# Altium PCB Inverter.PcbDoc (part 2 of 4)
Units mm, origin at the board's own origin, x right, y up, seen from the top; angles counter-clockwise.
Board outline 150 x 100 mm, 2 copper layers (Top Layer, Bottom Layer), stack 1.74 mm thick; 301 components, 199 nets, 1760 pads, 839 vias.
Unrouted connection lines stored in the file: 1.
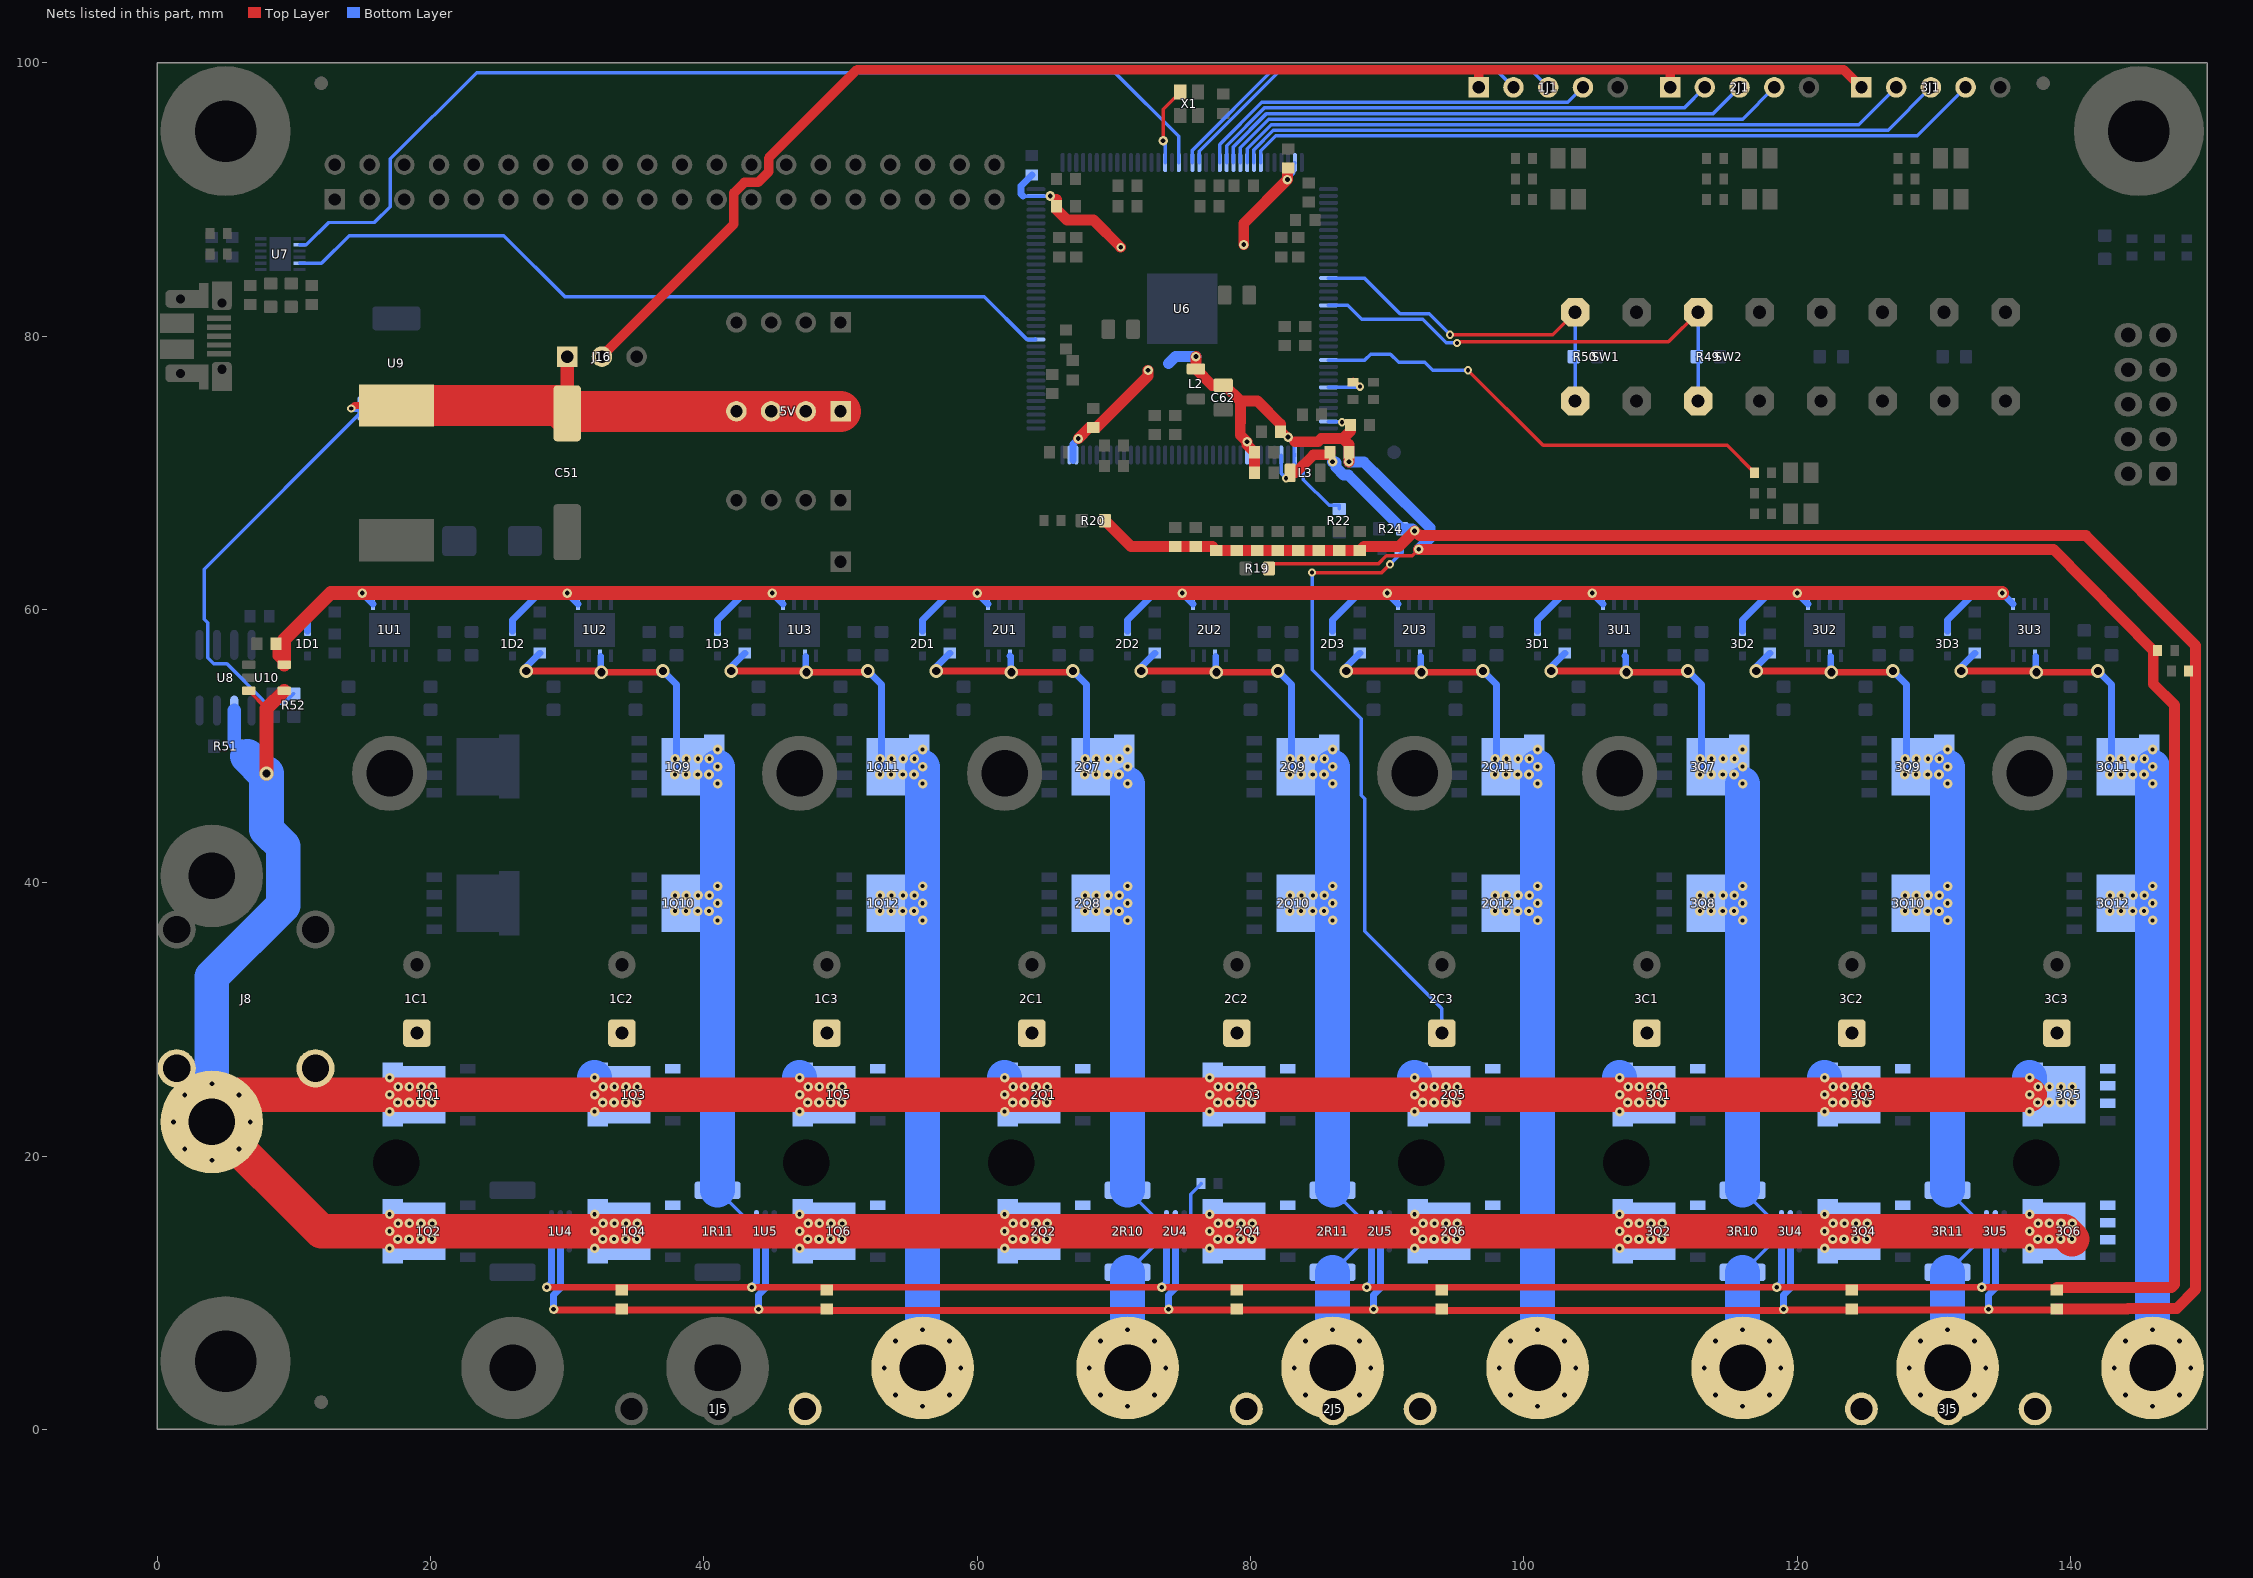
[diagram p2: the nets of this part, all layers, seen from the top]

## Via types
v1: diameter 0.7, hole 0.3, Top Layer to Bottom Layer, 475 vias
v2: diameter 0.7, hole 0.35, Top Layer to Bottom Layer, 232 vias
v3: diameter 0.6, hole 0.3, Top Layer to Bottom Layer, 78 vias
v4: diameter 1, hole 0.6, Top Layer to Bottom Layer, 30 vias
v5: diameter 1.27, hole 0.5, Top Layer to Bottom Layer, 24 vias

## Nets (pads, with @x,y where several pads share a name; then routed paths per layer and width w, separated by ;. In a path a pad name is that pad's centre, name@x,y a point inside that pad or via, vN(x,y) a via of type N, cw(c..) or ccw(c..) an arc to the next point about the centre after c; other vN are vias at no path point) (continued)
1PH_B_Q: 1C5.1 1Q3.S 1Q4.S 1Q9.D 1Q10.D 1R11.2 1U2.6 1U5.4 | length 269.2
  Top Layer w0.5: v4(27,55.5) v4@32.4,55.5 ; v4(32.5,55.4) v4@36.9,55.4
  Bottom Layer w0.254: 1R11.2@41,17.5 42.875,15.625 1U5.4@43.85,15.625
  Bottom Layer w0.5: v4(27,55.5) 27,55.8 1C5.1@28,56.8 ; v4@32.45,55.45 1U2.6@32.45,56.555 ; v4(37,55.5) 38,54.5 ; 1Q9.D@38,48.5 1Q9.D@38,49.075 ; 1Q9.D@38,48.5 38,54.5 ; 1Q9.D@38,48.5 38,54.5 ; 1Q9.D@38,48.5 38,54.5 ; 1Q9.D@38,48.5 38,54.5 ; 1Q9.D@38,48.5 38,54.5 ; 1Q9.D@38,48.5 38,54.5 ; 1Q9.D@38,48.5 1Q9.D@38,49.075 ; 1Q9.D@38,48.5 1Q9.D@38,49.075 ; 1Q9.D@38,48.5 1Q9.D@38,49.075 ; 1Q9.D@38,48.5 1Q9.D@38,49.075 ; 1Q9.D@38,48.5 38,54.5 ; 1Q9.D@38,48.5 38,54.5 ; 1Q9.D@38,48.5 1Q9.D@38,49.075 ; 1Q9.D@38,48.5 38,54.5 ; 1Q9.D@38,48.5 1Q9.D@38,49.075 ; 1Q9.D@38,48.5 1Q9.D@38,49.075 ; 1Q9.D@38,48.5 38,54.5 ; 1Q9.D@38,48.5 38,54.5 ; 1Q9.D@38,48.5 38,54.5 ; 1Q9.D@38,48.5 38,54.5 ; 1Q9.D@38,48.5 38,54.5 ; 1Q9.D@38,48.5 1Q9.D@38,49.075 ; 1Q9.D@38,49.075 38,54.5 ; 1Q9.D@38,49.075 38,54.5 ; 1Q9.D@38,49.075 38,54.5 ; 1Q9.D@38,49.075 38,54.5 ; 1Q9.D@38,49.075 38,54.5 ; 1Q9.D@38,49.075 38,54.5 ; 1Q9.D@38,49.075 38,54.5 ; 1Q9.D@38,49.075 38,54.5 ; 1Q9.D@38,49.075 38,54.5
  Bottom Layer w2.54: 1R11.2@41,17.5 v1(41,38.5) ; v1(41,37.25) 1Q10.D@41,37.925 ; v1(41,37.25) v1(41,38.5) ; v1(41,37.25) v1(41,38.5) ; v1(41,37.25) v1(41,38.5) ; v1(41,37.25) v1(41,38.5) ; v1(41,37.25) v1(41,38.5) ; v1(41,37.25) v1(41,38.5) ; v1(41,37.25) v1(41,38.5) ; v1(41,37.25) v1(41,38.5) ; v1(41,37.25) v1(41,38.5) ; v1(41,37.25) v1(41,38.5) ; v1(41,37.25) v1(41,38.5) ; v1(41,37.25) 1Q10.D@41,37.925 ; v1(41,37.25) 1Q10.D@41,37.925 ; v1(41,37.25) 1Q10.D@41,37.925 ; v1(41,37.25) 1Q10.D@41,37.925 ; v1(41,37.25) v1(41,38.5) ; v1(41,37.25) 1Q10.D@41,37.925 ; v1(41,37.25) v1(41,38.5) ; v1(41,37.25) 1Q10.D@41,37.925 ; v1(41,37.25) 1Q10.D@41,37.925 ; v1(41,37.25) 1Q10.D@41,37.925 ; 1Q10.D@41,37.925 v1(41,38.5) ; 1Q10.D@41,37.925 v1(41,38.5) ; 1Q10.D@41,37.925 v1(41,38.5) ; 1Q10.D@41,37.925 v1(41,38.5) ; 1Q10.D@41,37.925 v1(41,38.5) ; 1Q10.D@41,37.925 v1(41,38.5) ; 1Q10.D@41,37.925 v1(41,38.5) ; 1Q10.D@41,37.925 v1(41,38.5) ; 1Q10.D@41,37.925 v1(41,38.5) ; v1(41,38.5) 1Q10.D@41,39.075 ; v1(41,38.5) v1(41,39.75) ; v1(41,38.5) v1(41,39.75) ; v1(41,38.5) v1(41,39.75) ; v1(41,38.5) 1Q10.D@41,39.075 ; v1(41,38.5) v1(41,39.75) ; v1(41,38.5) v1(41,39.75) ; v1(41,38.5) v1(41,39.75) ; v1(41,38.5) 1Q10.D@41,39.075 ; v1(41,38.5) v1(41,39.75) ; v1(41,38.5) v1(41,39.75) ; v1(41,38.5) 1Q10.D@41,39.075 ; v1(41,38.5) 1Q10.D@41,39.075 ; v1(41,38.5) 1Q10.D@41,39.075 ; v1(41,38.5) 1Q10.D@41,39.075 ; v1(41,38.5) v1(41,39.75) ; v1(41,38.5) v1(41,39.75) ; v1(41,38.5) v1(41,39.75) ; v1(41,38.5) 1Q10.D@41,39.075 ; v1(41,38.5) v1(41,39.75) ; v1(41,38.5) v1(41,39.75) ; v1(41,38.5) 1Q10.D@41,39.075 ; v1(41,38.5) v1(41,39.75) ; 1Q10.D@41,39.075 v1(41,39.75) ; 1Q10.D@41,39.075 v1(41,39.75) ; 1Q10.D@41,39.075 v1(41,39.75) ; 1Q10.D@41,39.075 v1(41,39.75) ; 1Q10.D@41,39.075 v1(41,39.75) ; 1Q10.D@41,39.075 v1(41,39.75) ; 1Q10.D@41,39.075 v1(41,39.75) ; 1Q10.D@41,39.075 v1(41,39.75) ; 1Q10.D@41,39.075 v1(41,39.75) ; v1(41,39.75) v1(41,47.25) ; v1(41,47.25) 1Q9.D@41,47.925 ; v1(41,47.25) v1(41,48.5) ; v1(41,47.25) v1(41,48.5) ; v1(41,47.25) v1(41,48.5) ; v1(41,47.25) v1(41,48.5) ; v1(41,47.25) v1(41,48.5) ; v1(41,47.25) v1(41,48.5) ; v1(41,47.25) v1(41,48.5) ; v1(41,47.25) v1(41,48.5) ; v1(41,47.25) v1(41,48.5) ; v1(41,47.25) 1Q9.D@41,47.925 ; v1(41,47.25) 1Q9.D@41,47.925 ; v1(41,47.25) 1Q9.D@41,47.925 ; v1(41,47.25) v1(41,48.5) ; v1(41,47.25) v1(41,48.5) ; v1(41,47.25) 1Q9.D@41,47.925 ; v1(41,47.25) 1Q9.D@41,47.925 ; v1(41,47.25) 1Q9.D@41,47.925 ; v1(41,47.25) 1Q9.D@41,47.925 ; v1(41,47.25) v1(41,48.5) ; v1(41,47.25) v1(41,48.5) ; v1(41,47.25) v1(41,48.5) ; v1(41,47.25) 1Q9.D@41,47.925 ; 1Q9.D@41,47.925 v1(41,48.5) ; 1Q9.D@41,47.925 v1(41,48.5) ; 1Q9.D@41,47.925 v1(41,48.5) ; 1Q9.D@41,47.925 v1(41,48.5) ; 1Q9.D@41,47.925 v1(41,48.5) ; 1Q9.D@41,47.925 v1(41,48.5) ; 1Q9.D@41,47.925 v1(41,48.5) ; 1Q9.D@41,47.925 v1(41,48.5) ; 1Q9.D@41,47.925 v1(41,48.5)
  other v1: 37.875,37.925 38.7,37.925 39.55,37.925 40.375,37.925 37.9,39.075 38.725,39.075 39.575,39.075 40.4,39.075 37.875,47.925 38.7,47.925 39.55,47.925 40.375,47.925 37.9,49.075 38.725,49.075 39.575,49.075 40.4,49.075 41,49.75
1PH_C: 1C6.1 1C.1 1J5.3 1Q5.S 1Q6.S 1Q11.D 1Q12.D 1U3.6 | length 278.5
  Top Layer w0.5: v4(42,55.5) v4@47.4,55.5 ; v4(47.5,55.4) v4@51.9,55.4
  Bottom Layer w0.5: v4(42,55.5) 42,55.8 1C6.1@43,56.8 ; v4@47.45,55.45 1U3.6@47.45,56.555 ; v4(52,55.5) 53,54.5 ; 1Q11.D@53,48.5 1Q11.D@53,49.075 ; 1Q11.D@53,48.5 53,54.5 ; 1Q11.D@53,48.5 53,54.5 ; 1Q11.D@53,48.5 53,54.5 ; 1Q11.D@53,48.5 1Q11.D@53,49.075 ; 1Q11.D@53,48.5 1Q11.D@53,49.075 ; 1Q11.D@53,48.5 1Q11.D@53,49.075 ; 1Q11.D@53,48.5 1Q11.D@53,49.075 ; 1Q11.D@53,48.5 1Q11.D@53,49.075 ; 1Q11.D@53,48.5 1Q11.D@53,49.075 ; 1Q11.D@53,48.5 1Q11.D@53,49.075 ; 1Q11.D@53,48.5 53,54.5 ; 1Q11.D@53,48.5 53,54.5 ; 1Q11.D@53,48.5 53,54.5 ; 1Q11.D@53,48.5 53,54.5 ; 1Q11.D@53,48.5 53,54.5 ; 1Q11.D@53,48.5 1Q11.D@53,49.075 ; 1Q11.D@53,48.5 53,54.5 ; 1Q11.D@53,48.5 53,54.5 ; 1Q11.D@53,48.5 53,54.5 ; 1Q11.D@53,48.5 53,54.5 ; 1Q11.D@53,48.5 53,54.5 ; 1Q11.D@53,48.5 53,54.5 ; 1Q11.D@53,49.075 53,54.5 ; 1Q11.D@53,49.075 53,54.5 ; 1Q11.D@53,49.075 53,54.5 ; 1Q11.D@53,49.075 53,54.5 ; 1Q11.D@53,49.075 53,54.5 ; 1Q11.D@53,49.075 53,54.5 ; 1Q11.D@53,49.075 53,54.5 ; 1Q11.D@53,49.075 53,54.5 ; 1Q11.D@53,49.075 53,54.5
  Bottom Layer w2.54: 1C.1@56,4.5 v1(56,37.25) ; v1(56,37.25) 1Q12.D@56,37.925 ; v1(56,37.25) v1(56,38.5) ; v1(56,37.25) 1Q12.D@56,37.925 ; v1(56,37.25) v1(56,38.5) ; v1(56,37.25) v1(56,38.5) ; v1(56,37.25) v1(56,38.5) ; v1(56,37.25) v1(56,38.5) ; v1(56,37.25) v1(56,38.5) ; v1(56,37.25) v1(56,38.5) ; v1(56,37.25) v1(56,38.5) ; v1(56,37.25) v1(56,38.5) ; v1(56,37.25) v1(56,38.5) ; v1(56,37.25) v1(56,38.5) ; v1(56,37.25) v1(56,38.5) ; v1(56,37.25) v1(56,38.5) ; v1(56,37.25) 1Q12.D@56,37.925 ; v1(56,37.25) 1Q12.D@56,37.925 ; v1(56,37.25) 1Q12.D@56,37.925 ; v1(56,37.25) 1Q12.D@56,37.925 ; v1(56,37.25) v1(56,38.5) ; v1(56,37.25) 1Q12.D@56,37.925 ; v1(56,37.25) 1Q12.D@56,37.925 ; v1(56,37.25) 1Q12.D@56,37.925 ; 1Q12.D@56,37.925 v1(56,38.5) ; 1Q12.D@56,37.925 v1(56,38.5) ; 1Q12.D@56,37.925 v1(56,38.5) ; 1Q12.D@56,37.925 v1(56,38.5) ; 1Q12.D@56,37.925 v1(56,38.5) ; 1Q12.D@56,37.925 v1(56,38.5) ; 1Q12.D@56,37.925 v1(56,38.5) ; 1Q12.D@56,37.925 v1(56,38.5) ; 1Q12.D@56,37.925 v1(56,38.5) ; v1(56,38.5) 1Q12.D@56,39.075 ; v1(56,38.5) v1(56,39.75) ; v1(56,38.5) v1(56,39.75) ; v1(56,38.5) 1Q12.D@56,39.075 ; v1(56,38.5) v1(56,39.75) ; v1(56,38.5) v1(56,39.75) ; v1(56,38.5) v1(56,39.75) ; v1(56,38.5) v1(56,39.75) ; v1(56,38.5) 1Q12.D@56,39.075 ; v1(56,38.5) v1(56,39.75) ; v1(56,38.5) 1Q12.D@56,39.075 ; v1(56,38.5) 1Q12.D@56,39.075 ; v1(56,38.5) 1Q12.D@56,39.075 ; v1(56,38.5) v1(56,39.75) ; v1(56,38.5) v1(56,39.75) ; v1(56,38.5) v1(56,39.75) ; v1(56,38.5) 1Q12.D@56,39.075 ; v1(56,38.5) v1(56,39.75) ; v1(56,38.5) v1(56,39.75) ; v1(56,38.5) v1(56,39.75) ; v1(56,38.5) v1(56,39.75) ; v1(56,38.5) 1Q12.D@56,39.075 ; v1(56,38.5) 1Q12.D@56,39.075 ; 1Q12.D@56,39.075 v1(56,39.75) ; 1Q12.D@56,39.075 v1(56,39.75) ; 1Q12.D@56,39.075 v1(56,39.75) ; 1Q12.D@56,39.075 v1(56,39.75) ; 1Q12.D@56,39.075 v1(56,39.75) ; 1Q12.D@56,39.075 v1(56,39.75) ; 1Q12.D@56,39.075 v1(56,39.75) ; 1Q12.D@56,39.075 v1(56,39.75) ; 1Q12.D@56,39.075 v1(56,39.75) ; v1(56,39.75) v1(56,47.25) ; v1(56,47.25) 1Q11.D@56,47.925 ; v1(56,47.25) v1(56,48.5) ; v1(56,47.25) v1(56,48.5) ; v1(56,47.25) v1(56,48.5) ; v1(56,47.25) v1(56,48.5) ; v1(56,47.25) v1(56,48.5) ; v1(56,47.25) v1(56,48.5) ; v1(56,47.25) v1(56,48.5) ; v1(56,47.25) v1(56,48.5) ; v1(56,47.25) v1(56,48.5) ; v1(56,47.25) v1(56,48.5) ; v1(56,47.25) 1Q11.D@56,47.925 ; v1(56,47.25) 1Q11.D@56,47.925 ; v1(56,47.25) v1(56,48.5) ; v1(56,47.25) 1Q11.D@56,47.925 ; v1(56,47.25) v1(56,48.5) ; v1(56,47.25) v1(56,48.5) ; v1(56,47.25) 1Q11.D@56,47.925 ; v1(56,47.25) 1Q11.D@56,47.925 ; v1(56,47.25) 1Q11.D@56,47.925 ; v1(56,47.25) 1Q11.D@56,47.925 ; v1(56,47.25) 1Q11.D@56,47.925 ; v1(56,47.25) v1(56,48.5) ; 1Q11.D@56,47.925 v1(56,48.5) ; 1Q11.D@56,47.925 v1(56,48.5) ; 1Q11.D@56,47.925 v1(56,48.5) ; 1Q11.D@56,47.925 v1(56,48.5) ; 1Q11.D@56,47.925 v1(56,48.5) ; 1Q11.D@56,47.925 v1(56,48.5) ; 1Q11.D@56,47.925 v1(56,48.5) ; 1Q11.D@56,47.925 v1(56,48.5) ; 1Q11.D@56,47.925 v1(56,48.5)
  other v1: 52.875,37.925 53.7,37.925 54.55,37.925 55.375,37.925 52.9,39.075 53.725,39.075 54.575,39.075 55.4,39.075 52.875,47.925 53.7,47.925 54.55,47.925 55.375,47.925 52.9,49.075 53.725,49.075 54.575,49.075 55.4,49.075 56,49.75
  other v2: 56,1.7 54.02,2.52 57.98,2.52 53.2,4.5 58.8,4.5 54.02,6.48 57.98,6.48 56,7.3
2PH_A: 2A.1 2J5.1 2R10.1 2U4.5 | length 12.6
  Bottom Layer w0.254: 2R10.1@71,11.5 74.5,15 2U4.5@74.5,15.625
  Bottom Layer w2.54: 2A.1@71,4.5 v2(71,7.3) 2R10.1@71,11.5
  other v2: 71,1.7 69.02,2.52 72.98,2.52 68.2,4.5 73.8,4.5 69.02,6.48 72.98,6.48
2PH_A_Q: 2C4.1 2Q1.S 2Q2.S 2Q7.D 2Q8.D 2R10.2 2U1.6 2U4.4 | length 241
  Top Layer w0.5: v4(57,55.5) v4@62.4,55.5 ; v4(62.5,55.4) 66.9,55.4 v4(67,55.5)
  Bottom Layer w0.254: 2R10.2@71,17.5 72.875,15.625 2U4.4@73.85,15.625
  Bottom Layer w0.5: 2C4.1@58,56.8 v4@57,55.8 ; 2U1.6@62.4,56.605 62.45,56.555 62.45,55.45 v4(62.5,55.4) ; v4(67,55.5) 68,54.5 ; v4@57,55.8 v4(57,55.5) v4@57,55.8 ; 2Q7.D@68,48.5 2Q7.D@68,49.075 ; 2Q7.D@68,48.5 68,54.5 ; 2Q7.D@68,48.5 68,54.5 ; 2Q7.D@68,48.5 68,54.5 ; 2Q7.D@68,48.5 68,54.5 ; 2Q7.D@68,48.5 68,54.5 ; 2Q7.D@68,48.5 2Q7.D@68,49.075 ; 2Q7.D@68,48.5 68,54.5 ; 2Q7.D@68,48.5 68,54.5 ; 2Q7.D@68,48.5 68,54.5 ; 2Q7.D@68,48.5 68,54.5 ; 2Q7.D@68,48.5 2Q7.D@68,49.075 ; 2Q7.D@68,48.5 2Q7.D@68,49.075 ; 2Q7.D@68,48.5 68,54.5 ; 2Q7.D@68,48.5 2Q7.D@68,49.075 ; 2Q7.D@68,48.5 2Q7.D@68,49.075 ; 2Q7.D@68,48.5 68,54.5 ; 2Q7.D@68,48.5 68,54.5 ; 2Q7.D@68,48.5 68,54.5 ; 2Q7.D@68,48.5 68,54.5 ; 2Q7.D@68,48.5 2Q7.D@68,49.075 ; 2Q7.D@68,48.5 2Q7.D@68,49.075 ; 2Q7.D@68,48.5 2Q7.D@68,49.075 ; 2Q7.D@68,49.075 68,54.5 ; 2Q7.D@68,49.075 68,54.5 ; 2Q7.D@68,49.075 68,54.5 ; 2Q7.D@68,49.075 68,54.5 ; 2Q7.D@68,49.075 68,54.5 ; 2Q7.D@68,49.075 68,54.5 ; 2Q7.D@68,49.075 68,54.5 ; 2Q7.D@68,49.075 68,54.5 ; 2Q7.D@68,49.075 68,54.5
  Bottom Layer w2.54: 2R10.2@71,17.5 v1(71,37.25) ; v1(71,47.25) v1(71,39.75) ; v1(71,37.25) 2Q8.D@71,37.925 ; v1(71,37.25) v1(71,38.5) ; v1(71,37.25) v1(71,38.5) ; v1(71,37.25) v1(71,38.5) ; v1(71,37.25) 2Q8.D@71,37.925 ; v1(71,37.25) 2Q8.D@71,37.925 ; v1(71,37.25) 2Q8.D@71,37.925 ; v1(71,37.25) 2Q8.D@71,37.925 ; v1(71,37.25) v1(71,38.5) ; v1(71,37.25) v1(71,38.5) ; v1(71,37.25) v1(71,38.5) ; v1(71,37.25) v1(71,38.5) ; v1(71,37.25) v1(71,38.5) ; v1(71,37.25) v1(71,38.5) ; v1(71,37.25) v1(71,38.5) ; v1(71,37.25) v1(71,38.5) ; v1(71,37.25) 2Q8.D@71,37.925 ; v1(71,37.25) 2Q8.D@71,37.925 ; v1(71,37.25) 2Q8.D@71,37.925 ; v1(71,37.25) v1(71,38.5) ; v1(71,37.25) v1(71,38.5) ; v1(71,37.25) 2Q8.D@71,37.925 ; v1(71,37.25) v1(71,38.5) ; 2Q8.D@71,37.925 v1(71,38.5) ; 2Q8.D@71,37.925 v1(71,38.5) ; 2Q8.D@71,37.925 v1(71,38.5) ; 2Q8.D@71,37.925 v1(71,38.5) ; 2Q8.D@71,37.925 v1(71,38.5) ; 2Q8.D@71,37.925 v1(71,38.5) ; 2Q8.D@71,37.925 v1(71,38.5) ; 2Q8.D@71,37.925 v1(71,38.5) ; 2Q8.D@71,37.925 v1(71,38.5) ; v1(71,38.5) 2Q8.D@71,39.075 ; v1(71,38.5) v1(71,39.75) ; v1(71,38.5) v1(71,39.75) ; v1(71,38.5) v1(71,39.75) ; v1(71,38.5) 2Q8.D@71,39.075 ; v1(71,38.5) 2Q8.D@71,39.075 ; v1(71,38.5) 2Q8.D@71,39.075 ; v1(71,38.5) 2Q8.D@71,39.075 ; v1(71,38.5) 2Q8.D@71,39.075 ; v1(71,38.5) 2Q8.D@71,39.075 ; v1(71,38.5) v1(71,39.75) ; v1(71,38.5) v1(71,39.75) ; v1(71,38.5) v1(71,39.75) ; v1(71,38.5) v1(71,39.75) ; v1(71,38.5) v1(71,39.75) ; v1(71,38.5) 2Q8.D@71,39.075 ; v1(71,38.5) 2Q8.D@71,39.075 ; v1(71,38.5) v1(71,39.75) ; v1(71,38.5) v1(71,39.75) ; v1(71,38.5) v1(71,39.75) ; v1(71,38.5) v1(71,39.75) ; v1(71,38.5) v1(71,39.75) ; v1(71,38.5) v1(71,39.75) ; 2Q8.D@71,39.075 v1(71,39.75) ; 2Q8.D@71,39.075 v1(71,39.75) ; 2Q8.D@71,39.075 v1(71,39.75) ; 2Q8.D@71,39.075 v1(71,39.75) ; 2Q8.D@71,39.075 v1(71,39.75) ; 2Q8.D@71,39.075 v1(71,39.75) ; 2Q8.D@71,39.075 v1(71,39.75) ; 2Q8.D@71,39.075 v1(71,39.75) ; 2Q8.D@71,39.075 v1(71,39.75)
  other v1: 67.875,37.925 68.7,37.925 69.55,37.925 70.375,37.925 67.9,39.075 68.725,39.075 69.575,39.075 70.4,39.075 67.875,47.925 68.7,47.925 69.55,47.925 70.375,47.925 71,48.5 67.9,49.075 68.725,49.075 69.575,49.075 70.4,49.075 71,49.75
2PH_B: 2B.1 2J5.2 2R11.1 2U5.5 | length 12.6
  Bottom Layer w0.254: 2R11.1@86,11.5 89.5,15 2U5.5@89.5,15.625
  Bottom Layer w2.54: 2B.1@86,4.5 v2(86,7.3) 2R11.1@86,11.5
  other v2: 86,1.7 84.02,2.52 87.98,2.52 83.2,4.5 88.8,4.5 84.02,6.48 87.98,6.48
2PH_B_Q: 2C5.1 2Q3.S 2Q4.S 2Q9.D 2Q10.D 2R11.2 2U2.6 2U5.4 | length 269.2
  Top Layer w0.5: v4(72,55.5) v4@77.4,55.5 ; v4(77.5,55.4) v4@81.9,55.4
  Bottom Layer w0.254: 2R11.2@86,17.5 87.875,15.625 2U5.4@88.85,15.625
  Bottom Layer w0.5: v4(72,55.5) 72,55.8 2C5.1@73,56.8 ; v4@77.45,55.45 2U2.6@77.45,56.555 ; v4(82,55.5) 83,54.5 ; 2Q9.D@83,48.5 2Q9.D@83,49.075 ; 2Q9.D@83,48.5 83,54.5 ; 2Q9.D@83,48.5 83,54.5 ; 2Q9.D@83,48.5 83,54.5 ; 2Q9.D@83,48.5 83,54.5 ; 2Q9.D@83,48.5 83,54.5 ; 2Q9.D@83,48.5 83,54.5 ; 2Q9.D@83,48.5 2Q9.D@83,49.075 ; 2Q9.D@83,48.5 2Q9.D@83,49.075 ; 2Q9.D@83,48.5 2Q9.D@83,49.075 ; 2Q9.D@83,48.5 2Q9.D@83,49.075 ; 2Q9.D@83,48.5 83,54.5 ; 2Q9.D@83,48.5 83,54.5 ; 2Q9.D@83,48.5 2Q9.D@83,49.075 ; 2Q9.D@83,48.5 83,54.5 ; 2Q9.D@83,48.5 2Q9.D@83,49.075 ; 2Q9.D@83,48.5 2Q9.D@83,49.075 ; 2Q9.D@83,48.5 83,54.5 ; 2Q9.D@83,48.5 83,54.5 ; 2Q9.D@83,48.5 83,54.5 ; 2Q9.D@83,48.5 83,54.5 ; 2Q9.D@83,48.5 83,54.5 ; 2Q9.D@83,48.5 2Q9.D@83,49.075 ; 2Q9.D@83,49.075 83,54.5 ; 2Q9.D@83,49.075 83,54.5 ; 2Q9.D@83,49.075 83,54.5 ; 2Q9.D@83,49.075 83,54.5 ; 2Q9.D@83,49.075 83,54.5 ; 2Q9.D@83,49.075 83,54.5 ; 2Q9.D@83,49.075 83,54.5 ; 2Q9.D@83,49.075 83,54.5 ; 2Q9.D@83,49.075 83,54.5
  Bottom Layer w2.54: 2R11.2@86,17.5 v1(86,38.5) ; v1(86,37.25) 2Q10.D@86,37.925 ; v1(86,37.25) v1(86,38.5) ; v1(86,37.25) v1(86,38.5) ; v1(86,37.25) v1(86,38.5) ; v1(86,37.25) v1(86,38.5) ; v1(86,37.25) v1(86,38.5) ; v1(86,37.25) v1(86,38.5) ; v1(86,37.25) v1(86,38.5) ; v1(86,37.25) v1(86,38.5) ; v1(86,37.25) v1(86,38.5) ; v1(86,37.25) v1(86,38.5) ; v1(86,37.25) v1(86,38.5) ; v1(86,37.25) 2Q10.D@86,37.925 ; v1(86,37.25) 2Q10.D@86,37.925 ; v1(86,37.25) 2Q10.D@86,37.925 ; v1(86,37.25) 2Q10.D@86,37.925 ; v1(86,37.25) v1(86,38.5) ; v1(86,37.25) 2Q10.D@86,37.925 ; v1(86,37.25) v1(86,38.5) ; v1(86,37.25) 2Q10.D@86,37.925 ; v1(86,37.25) 2Q10.D@86,37.925 ; v1(86,37.25) 2Q10.D@86,37.925 ; 2Q10.D@86,37.925 v1(86,38.5) ; 2Q10.D@86,37.925 v1(86,38.5) ; 2Q10.D@86,37.925 v1(86,38.5) ; 2Q10.D@86,37.925 v1(86,38.5) ; 2Q10.D@86,37.925 v1(86,38.5) ; 2Q10.D@86,37.925 v1(86,38.5) ; 2Q10.D@86,37.925 v1(86,38.5) ; 2Q10.D@86,37.925 v1(86,38.5) ; 2Q10.D@86,37.925 v1(86,38.5) ; v1(86,38.5) 2Q10.D@86,39.075 ; v1(86,38.5) v1(86,39.75) ; v1(86,38.5) v1(86,39.75) ; v1(86,38.5) v1(86,39.75) ; v1(86,38.5) 2Q10.D@86,39.075 ; v1(86,38.5) v1(86,39.75) ; v1(86,38.5) v1(86,39.75) ; v1(86,38.5) v1(86,39.75) ; v1(86,38.5) 2Q10.D@86,39.075 ; v1(86,38.5) v1(86,39.75) ; v1(86,38.5) v1(86,39.75) ; v1(86,38.5) 2Q10.D@86,39.075 ; v1(86,38.5) 2Q10.D@86,39.075 ; v1(86,38.5) 2Q10.D@86,39.075 ; v1(86,38.5) 2Q10.D@86,39.075 ; v1(86,38.5) v1(86,39.75) ; v1(86,38.5) v1(86,39.75) ; v1(86,38.5) v1(86,39.75) ; v1(86,38.5) 2Q10.D@86,39.075 ; v1(86,38.5) v1(86,39.75) ; v1(86,38.5) v1(86,39.75) ; v1(86,38.5) 2Q10.D@86,39.075 ; v1(86,38.5) v1(86,39.75) ; 2Q10.D@86,39.075 v1(86,39.75) ; 2Q10.D@86,39.075 v1(86,39.75) ; 2Q10.D@86,39.075 v1(86,39.75) ; 2Q10.D@86,39.075 v1(86,39.75) ; 2Q10.D@86,39.075 v1(86,39.75) ; 2Q10.D@86,39.075 v1(86,39.75) ; 2Q10.D@86,39.075 v1(86,39.75) ; 2Q10.D@86,39.075 v1(86,39.75) ; 2Q10.D@86,39.075 v1(86,39.75) ; v1(86,39.75) v1(86,47.25) ; v1(86,47.25) 2Q9.D@86,47.925 ; v1(86,47.25) v1(86,48.5) ; v1(86,47.25) v1(86,48.5) ; v1(86,47.25) v1(86,48.5) ; v1(86,47.25) v1(86,48.5) ; v1(86,47.25) v1(86,48.5) ; v1(86,47.25) v1(86,48.5) ; v1(86,47.25) v1(86,48.5) ; v1(86,47.25) v1(86,48.5) ; v1(86,47.25) v1(86,48.5) ; v1(86,47.25) 2Q9.D@86,47.925 ; v1(86,47.25) 2Q9.D@86,47.925 ; v1(86,47.25) 2Q9.D@86,47.925 ; v1(86,47.25) v1(86,48.5) ; v1(86,47.25) v1(86,48.5) ; v1(86,47.25) 2Q9.D@86,47.925 ; v1(86,47.25) 2Q9.D@86,47.925 ; v1(86,47.25) 2Q9.D@86,47.925 ; v1(86,47.25) 2Q9.D@86,47.925 ; v1(86,47.25) v1(86,48.5) ; v1(86,47.25) v1(86,48.5) ; v1(86,47.25) v1(86,48.5) ; v1(86,47.25) 2Q9.D@86,47.925 ; 2Q9.D@86,47.925 v1(86,48.5) ; 2Q9.D@86,47.925 v1(86,48.5) ; 2Q9.D@86,47.925 v1(86,48.5) ; 2Q9.D@86,47.925 v1(86,48.5) ; 2Q9.D@86,47.925 v1(86,48.5) ; 2Q9.D@86,47.925 v1(86,48.5) ; 2Q9.D@86,47.925 v1(86,48.5) ; 2Q9.D@86,47.925 v1(86,48.5) ; 2Q9.D@86,47.925 v1(86,48.5)
  other v1: 82.875,37.925 83.7,37.925 84.55,37.925 85.375,37.925 82.9,39.075 83.725,39.075 84.575,39.075 85.4,39.075 82.875,47.925 83.7,47.925 84.55,47.925 85.375,47.925 82.9,49.075 83.725,49.075 84.575,49.075 85.4,49.075 86,49.75
2PH_C: 2C6.1 2C.1 2J5.3 2Q5.S 2Q6.S 2Q11.D 2Q12.D 2U3.6 | length 278.5
  Top Layer w0.5: v4(87,55.5) v4@92.4,55.5 ; v4(92.5,55.4) v4@96.9,55.4
  Bottom Layer w0.5: v4(87,55.5) 87,55.8 2C6.1@88,56.8 ; v4@92.45,55.45 2U3.6@92.45,56.555 ; v4(97,55.5) 98,54.5 ; 2Q11.D@98,48.5 2Q11.D@98,49.075 ; 2Q11.D@98,48.5 98,54.5 ; 2Q11.D@98,48.5 98,54.5 ; 2Q11.D@98,48.5 98,54.5 ; 2Q11.D@98,48.5 2Q11.D@98,49.075 ; 2Q11.D@98,48.5 2Q11.D@98,49.075 ; 2Q11.D@98,48.5 2Q11.D@98,49.075 ; 2Q11.D@98,48.5 2Q11.D@98,49.075 ; 2Q11.D@98,48.5 2Q11.D@98,49.075 ; 2Q11.D@98,48.5 2Q11.D@98,49.075 ; 2Q11.D@98,48.5 2Q11.D@98,49.075 ; 2Q11.D@98,48.5 98,54.5 ; 2Q11.D@98,48.5 98,54.5 ; 2Q11.D@98,48.5 98,54.5 ; 2Q11.D@98,48.5 98,54.5 ; 2Q11.D@98,48.5 98,54.5 ; 2Q11.D@98,48.5 2Q11.D@98,49.075 ; 2Q11.D@98,48.5 98,54.5 ; 2Q11.D@98,48.5 98,54.5 ; 2Q11.D@98,48.5 98,54.5 ; 2Q11.D@98,48.5 98,54.5 ; 2Q11.D@98,48.5 98,54.5 ; 2Q11.D@98,48.5 98,54.5 ; 2Q11.D@98,49.075 98,54.5 ; 2Q11.D@98,49.075 98,54.5 ; 2Q11.D@98,49.075 98,54.5 ; 2Q11.D@98,49.075 98,54.5 ; 2Q11.D@98,49.075 98,54.5 ; 2Q11.D@98,49.075 98,54.5 ; 2Q11.D@98,49.075 98,54.5 ; 2Q11.D@98,49.075 98,54.5 ; 2Q11.D@98,49.075 98,54.5
  Bottom Layer w2.54: 2C.1@101,4.5 v1(101,37.25) ; v1(101,37.25) 2Q12.D@101,37.925 ; v1(101,37.25) v1(101,38.5) ; v1(101,37.25) 2Q12.D@101,37.925 ; v1(101,37.25) v1(101,38.5) ; v1(101,37.25) v1(101,38.5) ; v1(101,37.25) v1(101,38.5) ; v1(101,37.25) v1(101,38.5) ; v1(101,37.25) v1(101,38.5) ; v1(101,37.25) v1(101,38.5) ; v1(101,37.25) v1(101,38.5) ; v1(101,37.25) v1(101,38.5) ; v1(101,37.25) v1(101,38.5) ; v1(101,37.25) v1(101,38.5) ; v1(101,37.25) v1(101,38.5) ; v1(101,37.25) v1(101,38.5) ; v1(101,37.25) 2Q12.D@101,37.925 ; v1(101,37.25) 2Q12.D@101,37.925 ; v1(101,37.25) 2Q12.D@101,37.925 ; v1(101,37.25) 2Q12.D@101,37.925 ; v1(101,37.25) v1(101,38.5) ; v1(101,37.25) 2Q12.D@101,37.925 ; v1(101,37.25) 2Q12.D@101,37.925 ; v1(101,37.25) 2Q12.D@101,37.925 ; 2Q12.D@101,37.925 v1(101,38.5) ; 2Q12.D@101,37.925 v1(101,38.5) ; 2Q12.D@101,37.925 v1(101,38.5) ; 2Q12.D@101,37.925 v1(101,38.5) ; 2Q12.D@101,37.925 v1(101,38.5) ; 2Q12.D@101,37.925 v1(101,38.5) ; 2Q12.D@101,37.925 v1(101,38.5) ; 2Q12.D@101,37.925 v1(101,38.5) ; 2Q12.D@101,37.925 v1(101,38.5) ; v1(101,38.5) 2Q12.D@101,39.075 ; v1(101,38.5) v1(101,39.75) ; v1(101,38.5) v1(101,39.75) ; v1(101,38.5) 2Q12.D@101,39.075 ; v1(101,38.5) v1(101,39.75) ; v1(101,38.5) v1(101,39.75) ; v1(101,38.5) v1(101,39.75) ; v1(101,38.5) v1(101,39.75) ; v1(101,38.5) 2Q12.D@101,39.075 ; v1(101,38.5) v1(101,39.75) ; v1(101,38.5) 2Q12.D@101,39.075 ; v1(101,38.5) 2Q12.D@101,39.075 ; v1(101,38.5) 2Q12.D@101,39.075 ; v1(101,38.5) v1(101,39.75) ; v1(101,38.5) v1(101,39.75) ; v1(101,38.5) v1(101,39.75) ; v1(101,38.5) 2Q12.D@101,39.075 ; v1(101,38.5) v1(101,39.75) ; v1(101,38.5) v1(101,39.75) ; v1(101,38.5) v1(101,39.75) ; v1(101,38.5) v1(101,39.75) ; v1(101,38.5) 2Q12.D@101,39.075 ; v1(101,38.5) 2Q12.D@101,39.075 ; 2Q12.D@101,39.075 v1(101,39.75) ; 2Q12.D@101,39.075 v1(101,39.75) ; 2Q12.D@101,39.075 v1(101,39.75) ; 2Q12.D@101,39.075 v1(101,39.75) ; 2Q12.D@101,39.075 v1(101,39.75) ; 2Q12.D@101,39.075 v1(101,39.75) ; 2Q12.D@101,39.075 v1(101,39.75) ; 2Q12.D@101,39.075 v1(101,39.75) ; 2Q12.D@101,39.075 v1(101,39.75) ; v1(101,39.75) v1(101,47.25) ; v1(101,47.25) 2Q11.D@101,47.925 ; v1(101,47.25) v1(101,48.5) ; v1(101,47.25) v1(101,48.5) ; v1(101,47.25) v1(101,48.5) ; v1(101,47.25) v1(101,48.5) ; v1(101,47.25) v1(101,48.5) ; v1(101,47.25) v1(101,48.5) ; v1(101,47.25) v1(101,48.5) ; v1(101,47.25) v1(101,48.5) ; v1(101,47.25) v1(101,48.5) ; v1(101,47.25) v1(101,48.5) ; v1(101,47.25) 2Q11.D@101,47.925 ; v1(101,47.25) 2Q11.D@101,47.925 ; v1(101,47.25) v1(101,48.5) ; v1(101,47.25) 2Q11.D@101,47.925 ; v1(101,47.25) v1(101,48.5) ; v1(101,47.25) v1(101,48.5) ; v1(101,47.25) 2Q11.D@101,47.925 ; v1(101,47.25) 2Q11.D@101,47.925 ; v1(101,47.25) 2Q11.D@101,47.925 ; v1(101,47.25) 2Q11.D@101,47.925 ; v1(101,47.25) 2Q11.D@101,47.925 ; v1(101,47.25) v1(101,48.5) ; 2Q11.D@101,47.925 v1(101,48.5) ; 2Q11.D@101,47.925 v1(101,48.5) ; 2Q11.D@101,47.925 v1(101,48.5) ; 2Q11.D@101,47.925 v1(101,48.5) ; 2Q11.D@101,47.925 v1(101,48.5) ; 2Q11.D@101,47.925 v1(101,48.5) ; 2Q11.D@101,47.925 v1(101,48.5) ; 2Q11.D@101,47.925 v1(101,48.5) ; 2Q11.D@101,47.925 v1(101,48.5)
  other v1: 97.875,37.925 98.7,37.925 99.55,37.925 100.375,37.925 97.9,39.075 98.725,39.075 99.575,39.075 100.4,39.075 97.875,47.925 98.7,47.925 99.55,47.925 100.375,47.925 97.9,49.075 98.725,49.075 99.575,49.075 100.4,49.075 101,49.75
  other v2: 101,1.7 99.02,2.52 102.98,2.52 98.2,4.5 103.8,4.5 99.02,6.48 102.98,6.48 101,7.3
3PH_A: 3A.1 3J5.1 3R10.1 3U4.5 | length 12.6
  Bottom Layer w0.254: 3R10.1@116,11.5 119.5,15 3U4.5@119.5,15.625
  Bottom Layer w2.54: 3A.1@116,4.5 v2(116,7.3) 3R10.1@116,11.5
  other v2: 116,1.7 114.02,2.52 117.98,2.52 113.2,4.5 118.8,4.5 114.02,6.48 117.98,6.48
3PH_A_Q: 3C4.1 3Q1.S 3Q2.S 3Q7.D 3Q8.D 3R10.2 3U1.6 3U4.4 | length 241
  Top Layer w0.5: v4(102,55.5) v4@107.4,55.5 ; v4(107.5,55.4) 111.9,55.4 v4(112,55.5)
  Bottom Layer w0.254: 3R10.2@116,17.5 117.875,15.625 3U4.4@118.85,15.625
  Bottom Layer w0.5: 3C4.1@103,56.8 v4@102,55.8 ; 3U1.6@107.4,56.605 107.45,56.555 107.45,55.45 v4(107.5,55.4) ; v4(112,55.5) 113,54.5 ; v4@102,55.8 v4(102,55.5) v4@102,55.8 ; 3Q7.D@113,48.5 3Q7.D@113,49.075 ; 3Q7.D@113,48.5 113,54.5 ; 3Q7.D@113,48.5 113,54.5 ; 3Q7.D@113,48.5 113,54.5 ; 3Q7.D@113,48.5 113,54.5 ; 3Q7.D@113,48.5 113,54.5 ; 3Q7.D@113,48.5 3Q7.D@113,49.075 ; 3Q7.D@113,48.5 113,54.5 ; 3Q7.D@113,48.5 113,54.5 ; 3Q7.D@113,48.5 113,54.5 ; 3Q7.D@113,48.5 113,54.5 ; 3Q7.D@113,48.5 3Q7.D@113,49.075 ; 3Q7.D@113,48.5 3Q7.D@113,49.075 ; 3Q7.D@113,48.5 113,54.5 ; 3Q7.D@113,48.5 3Q7.D@113,49.075 ; 3Q7.D@113,48.5 3Q7.D@113,49.075 ; 3Q7.D@113,48.5 113,54.5 ; 3Q7.D@113,48.5 113,54.5 ; 3Q7.D@113,48.5 113,54.5 ; 3Q7.D@113,48.5 113,54.5 ; 3Q7.D@113,48.5 3Q7.D@113,49.075 ; 3Q7.D@113,48.5 3Q7.D@113,49.075 ; 3Q7.D@113,48.5 3Q7.D@113,49.075 ; 3Q7.D@113,49.075 113,54.5 ; 3Q7.D@113,49.075 113,54.5 ; 3Q7.D@113,49.075 113,54.5 ; 3Q7.D@113,49.075 113,54.5 ; 3Q7.D@113,49.075 113,54.5 ; 3Q7.D@113,49.075 113,54.5 ; 3Q7.D@113,49.075 113,54.5 ; 3Q7.D@113,49.075 113,54.5 ; 3Q7.D@113,49.075 113,54.5
  Bottom Layer w2.54: 3R10.2@116,17.5 v1(116,37.25) ; v1(116,47.25) v1(116,39.75) ; v1(116,37.25) 3Q8.D@116,37.925 ; v1(116,37.25) v1(116,38.5) ; v1(116,37.25) v1(116,38.5) ; v1(116,37.25) v1(116,38.5) ; v1(116,37.25) 3Q8.D@116,37.925 ; v1(116,37.25) 3Q8.D@116,37.925 ; v1(116,37.25) 3Q8.D@116,37.925 ; v1(116,37.25) 3Q8.D@116,37.925 ; v1(116,37.25) v1(116,38.5) ; v1(116,37.25) v1(116,38.5) ; v1(116,37.25) v1(116,38.5) ; v1(116,37.25) v1(116,38.5) ; v1(116,37.25) v1(116,38.5) ; v1(116,37.25) v1(116,38.5) ; v1(116,37.25) v1(116,38.5) ; v1(116,37.25) v1(116,38.5) ; v1(116,37.25) 3Q8.D@116,37.925 ; v1(116,37.25) 3Q8.D@116,37.925 ; v1(116,37.25) 3Q8.D@116,37.925 ; v1(116,37.25) v1(116,38.5) ; v1(116,37.25) v1(116,38.5) ; v1(116,37.25) 3Q8.D@116,37.925 ; v1(116,37.25) v1(116,38.5) ; 3Q8.D@116,37.925 v1(116,38.5) ; 3Q8.D@116,37.925 v1(116,38.5) ; 3Q8.D@116,37.925 v1(116,38.5) ; 3Q8.D@116,37.925 v1(116,38.5) ; 3Q8.D@116,37.925 v1(116,38.5) ; 3Q8.D@116,37.925 v1(116,38.5) ; 3Q8.D@116,37.925 v1(116,38.5) ; 3Q8.D@116,37.925 v1(116,38.5) ; 3Q8.D@116,37.925 v1(116,38.5) ; v1(116,38.5) 3Q8.D@116,39.075 ; v1(116,38.5) v1(116,39.75) ; v1(116,38.5) v1(116,39.75) ; v1(116,38.5) v1(116,39.75) ; v1(116,38.5) 3Q8.D@116,39.075 ; v1(116,38.5) 3Q8.D@116,39.075 ; v1(116,38.5) 3Q8.D@116,39.075 ; v1(116,38.5) 3Q8.D@116,39.075 ; v1(116,38.5) 3Q8.D@116,39.075 ; v1(116,38.5) 3Q8.D@116,39.075 ; v1(116,38.5) v1(116,39.75) ; v1(116,38.5) v1(116,39.75) ; v1(116,38.5) v1(116,39.75) ; v1(116,38.5) v1(116,39.75) ; v1(116,38.5) v1(116,39.75) ; v1(116,38.5) 3Q8.D@116,39.075 ; v1(116,38.5) 3Q8.D@116,39.075 ; v1(116,38.5) v1(116,39.75) ; v1(116,38.5) v1(116,39.75) ; v1(116,38.5) v1(116,39.75) ; v1(116,38.5) v1(116,39.75) ; v1(116,38.5) v1(116,39.75) ; v1(116,38.5) v1(116,39.75) ; 3Q8.D@116,39.075 v1(116,39.75) ; 3Q8.D@116,39.075 v1(116,39.75) ; 3Q8.D@116,39.075 v1(116,39.75) ; 3Q8.D@116,39.075 v1(116,39.75) ; 3Q8.D@116,39.075 v1(116,39.75) ; 3Q8.D@116,39.075 v1(116,39.75) ; 3Q8.D@116,39.075 v1(116,39.75) ; 3Q8.D@116,39.075 v1(116,39.75) ; 3Q8.D@116,39.075 v1(116,39.75)
  other v1: 112.875,37.925 113.7,37.925 114.55,37.925 115.375,37.925 112.9,39.075 113.725,39.075 114.575,39.075 115.4,39.075 112.875,47.925 113.7,47.925 114.55,47.925 115.375,47.925 116,48.5 112.9,49.075 113.725,49.075 114.575,49.075 115.4,49.075 116,49.75
3PH_B: 3B.1 3J5.2 3R11.1 3U5.5 | length 12.6
  Bottom Layer w0.254: 3R11.1@131,11.5 134.5,15 3U5.5@134.5,15.625
  Bottom Layer w2.54: 3B.1@131,4.5 v2(131,7.3) 3R11.1@131,11.5
  other v2: 131,1.7 129.02,2.52 132.98,2.52 128.2,4.5 133.8,4.5 129.02,6.48 132.98,6.48
3PH_B_Q: 3C5.1 3Q3.S 3Q4.S 3Q9.D 3Q10.D 3R11.2 3U2.6 3U5.4 | length 269.2
  Top Layer w0.5: v4(117,55.5) v4@122.4,55.5 ; v4(122.5,55.4) v4@126.9,55.4
  Bottom Layer w0.254: 3R11.2@131,17.5 132.875,15.625 3U5.4@133.85,15.625
  Bottom Layer w0.5: v4(117,55.5) 117,55.8 3C5.1@118,56.8 ; v4@122.45,55.45 3U2.6@122.45,56.555 ; v4(127,55.5) 128,54.5 ; 3Q9.D@128,48.5 3Q9.D@128,49.075 ; 3Q9.D@128,48.5 128,54.5 ; 3Q9.D@128,48.5 128,54.5 ; 3Q9.D@128,48.5 128,54.5 ; 3Q9.D@128,48.5 128,54.5 ; 3Q9.D@128,48.5 128,54.5 ; 3Q9.D@128,48.5 128,54.5 ; 3Q9.D@128,48.5 3Q9.D@128,49.075 ; 3Q9.D@128,48.5 3Q9.D@128,49.075 ; 3Q9.D@128,48.5 3Q9.D@128,49.075 ; 3Q9.D@128,48.5 3Q9.D@128,49.075 ; 3Q9.D@128,48.5 128,54.5 ; 3Q9.D@128,48.5 128,54.5 ; 3Q9.D@128,48.5 3Q9.D@128,49.075 ; 3Q9.D@128,48.5 128,54.5 ; 3Q9.D@128,48.5 3Q9.D@128,49.075 ; 3Q9.D@128,48.5 3Q9.D@128,49.075 ; 3Q9.D@128,48.5 128,54.5 ; 3Q9.D@128,48.5 128,54.5 ; 3Q9.D@128,48.5 128,54.5 ; 3Q9.D@128,48.5 128,54.5 ; 3Q9.D@128,48.5 128,54.5 ; 3Q9.D@128,48.5 3Q9.D@128,49.075 ; 3Q9.D@128,49.075 128,54.5 ; 3Q9.D@128,49.075 128,54.5 ; 3Q9.D@128,49.075 128,54.5 ; 3Q9.D@128,49.075 128,54.5 ; 3Q9.D@128,49.075 128,54.5 ; 3Q9.D@128,49.075 128,54.5 ; 3Q9.D@128,49.075 128,54.5 ; 3Q9.D@128,49.075 128,54.5 ; 3Q9.D@128,49.075 128,54.5
  Bottom Layer w2.54: 3R11.2@131,17.5 v1(131,38.5) ; v1(131,37.25) 3Q10.D@131,37.925 ; v1(131,37.25) v1(131,38.5) ; v1(131,37.25) v1(131,38.5) ; v1(131,37.25) v1(131,38.5) ; v1(131,37.25) v1(131,38.5) ; v1(131,37.25) v1(131,38.5) ; v1(131,37.25) v1(131,38.5) ; v1(131,37.25) v1(131,38.5) ; v1(131,37.25) v1(131,38.5) ; v1(131,37.25) v1(131,38.5) ; v1(131,37.25) v1(131,38.5) ; v1(131,37.25) v1(131,38.5) ; v1(131,37.25) 3Q10.D@131,37.925 ; v1(131,37.25) 3Q10.D@131,37.925 ; v1(131,37.25) 3Q10.D@131,37.925 ; v1(131,37.25) 3Q10.D@131,37.925 ; v1(131,37.25) v1(131,38.5) ; v1(131,37.25) 3Q10.D@131,37.925 ; v1(131,37.25) v1(131,38.5) ; v1(131,37.25) 3Q10.D@131,37.925 ; v1(131,37.25) 3Q10.D@131,37.925 ; v1(131,37.25) 3Q10.D@131,37.925 ; 3Q10.D@131,37.925 v1(131,38.5) ; 3Q10.D@131,37.925 v1(131,38.5) ; 3Q10.D@131,37.925 v1(131,38.5) ; 3Q10.D@131,37.925 v1(131,38.5) ; 3Q10.D@131,37.925 v1(131,38.5) ; 3Q10.D@131,37.925 v1(131,38.5) ; 3Q10.D@131,37.925 v1(131,38.5) ; 3Q10.D@131,37.925 v1(131,38.5) ; 3Q10.D@131,37.925 v1(131,38.5) ; v1(131,38.5) 3Q10.D@131,39.075 ; v1(131,38.5) v1(131,39.75) ; v1(131,38.5) v1(131,39.75) ; v1(131,38.5) v1(131,39.75) ; v1(131,38.5) 3Q10.D@131,39.075 ; v1(131,38.5) v1(131,39.75) ; v1(131,38.5) v1(131,39.75) ; v1(131,38.5) v1(131,39.75) ; v1(131,38.5) 3Q10.D@131,39.075 ; v1(131,38.5) v1(131,39.75) ; v1(131,38.5) v1(131,39.75) ; v1(131,38.5) 3Q10.D@131,39.075 ; v1(131,38.5) 3Q10.D@131,39.075 ; v1(131,38.5) 3Q10.D@131,39.075 ; v1(131,38.5) 3Q10.D@131,39.075 ; v1(131,38.5) v1(131,39.75) ; v1(131,38.5) v1(131,39.75) ; v1(131,38.5) v1(131,39.75) ; v1(131,38.5) 3Q10.D@131,39.075 ; v1(131,38.5) v1(131,39.75) ; v1(131,38.5) v1(131,39.75) ; v1(131,38.5) 3Q10.D@131,39.075 ; v1(131,38.5) v1(131,39.75) ; 3Q10.D@131,39.075 v1(131,39.75) ; 3Q10.D@131,39.075 v1(131,39.75) ; 3Q10.D@131,39.075 v1(131,39.75) ; 3Q10.D@131,39.075 v1(131,39.75) ; 3Q10.D@131,39.075 v1(131,39.75) ; 3Q10.D@131,39.075 v1(131,39.75) ; 3Q10.D@131,39.075 v1(131,39.75) ; 3Q10.D@131,39.075 v1(131,39.75) ; 3Q10.D@131,39.075 v1(131,39.75) ; v1(131,39.75) v1(131,47.25) ; v1(131,47.25) 3Q9.D@131,47.925 ; v1(131,47.25) v1(131,48.5) ; v1(131,47.25) v1(131,48.5) ; v1(131,47.25) v1(131,48.5) ; v1(131,47.25) v1(131,48.5) ; v1(131,47.25) v1(131,48.5) ; v1(131,47.25) v1(131,48.5) ; v1(131,47.25) v1(131,48.5) ; v1(131,47.25) v1(131,48.5) ; v1(131,47.25) v1(131,48.5) ; v1(131,47.25) 3Q9.D@131,47.925 ; v1(131,47.25) 3Q9.D@131,47.925 ; v1(131,47.25) 3Q9.D@131,47.925 ; v1(131,47.25) v1(131,48.5) ; v1(131,47.25) v1(131,48.5) ; v1(131,47.25) 3Q9.D@131,47.925 ; v1(131,47.25) 3Q9.D@131,47.925 ; v1(131,47.25) 3Q9.D@131,47.925 ; v1(131,47.25) 3Q9.D@131,47.925 ; v1(131,47.25) v1(131,48.5) ; v1(131,47.25) v1(131,48.5) ; v1(131,47.25) v1(131,48.5) ; v1(131,47.25) 3Q9.D@131,47.925 ; 3Q9.D@131,47.925 v1(131,48.5) ; 3Q9.D@131,47.925 v1(131,48.5) ; 3Q9.D@131,47.925 v1(131,48.5) ; 3Q9.D@131,47.925 v1(131,48.5) ; 3Q9.D@131,47.925 v1(131,48.5) ; 3Q9.D@131,47.925 v1(131,48.5) ; 3Q9.D@131,47.925 v1(131,48.5) ; 3Q9.D@131,47.925 v1(131,48.5) ; 3Q9.D@131,47.925 v1(131,48.5)
  other v1: 127.875,37.925 128.7,37.925 129.55,37.925 130.375,37.925 127.9,39.075 128.725,39.075 129.575,39.075 130.4,39.075 127.875,47.925 128.7,47.925 129.55,47.925 130.375,47.925 127.9,49.075 128.725,49.075 129.575,49.075 130.4,49.075 131,49.75
3PH_C: 3C6.1 3C.1 3J5.3 3Q5.S 3Q6.S 3Q11.D 3Q12.D 3U3.6 | length 74.5
  Top Layer w0.5: v4(132,55.5) v4@137.4,55.5 ; v4(137.5,55.4) v4@141.9,55.4
  Bottom Layer w0.5: v4@132,55.5 132,55.8 3C6.1@133,56.8 ; v4@137.45,55.45 3U3.6@137.45,56.555 ; v4(142,55.5) 143,54.5 ; 143,54.5 143,49.075 3Q11.D@143,48.5 143,54.5
  Bottom Layer w2.54: 3C.1@146,4.5 v1(146,37.25) ; 3Q11.D@146,47.925 v1(146,47.25) ; v1(146,37.25) 146,37.925 v1(146,38.5) ; v1(146,37.25) v1(146,38.5) ; v1(146,38.5) v1(146,39.75) ; v1(146,38.5) 146,39.075 v1(146,39.75) ; v1(146,39.75) v1(146,47.25) ; v1(146,47.25) v1(146,48.5) v1(146,47.25)
  other v1: 142.875,37.925 143.7,37.925 144.55,37.925 145.375,37.925 142.9,39.075 143.725,39.075 144.575,39.075 145.4,39.075 142.875,47.925 143.7,47.925 144.55,47.925 145.375,47.925 142.9,49.075 143.725,49.075 144.575,49.075 145.4,49.075 146,49.75
  other v2: 146,1.7 144.02,2.52 147.98,2.52 143.2,4.5 148.8,4.5 144.02,6.48 147.98,6.48 146,7.3
5V: 5V.1 5V.2 5V.3 5V.4 C51.1 J16.1 L1.1 R52.1 U9.3 | length 71.6
  Top Layer w0.5: v3(14.2,74.7) 14.425,74.925 L1.1@17.5,74.925
  Top Layer w1: C51.1@30,74.35 29.625,74.725 30,75.1 J16.1@30,78
  Top Layer w3: L1.1@17.5,74.925 C51.1@29.425,74.925 ; C51.1@30,74.35 30.15,74.5 5V.4@42.38,74.5 5V.3@44.92,74.5 5V.2@47.46,74.5 5V.1@50,74.5
  Bottom Layer w0.254: R52.1@10,53.85 9.271,53.121 7.95,53.121 7.721,53.35 7.721,53.404 5.104,56.021 4.125,56.021 3.686,56.46 3.686,59.023 3.428,59.281 3.428,62.928 U9.3@15.2,74.7
  Bottom Layer w0.5: v3(14.2,74.7) U9.3@15.2,74.7
12V: 1C7.2 1C8.2 1C9.2 1D1.A 1D2.A 1D3.A 1U1.1 1U2.1 1U3.1 2C7.2 2C8.2 2C9.2 2D1.A 2D2.A 2D3.A 2U1.1 2U2.1 2U3.1 3C7.2 3C8.2 3C9.2 3D1.A 3D2.A 3D3.A 3U1.1 3U2.1 3U3.1 C64.2 U10.5 | length 191.6
  Top Layer w0.5: C64.2@8.7,57.5 8.7,56.55 U10.5@9.3,55.95
  Top Layer w1: U10.5@9.3,55.95 9.3,57.8 12.7,61.2 v2(14.995,61.2) v2(29.995,61.2) v2(44.995,61.2) v2(59.995,61.2) v2(74.995,61.2) v2(89.995,61.2) v2(104.995,61.2) v2(119.995,61.2) v2(134.995,61.2)
  Bottom Layer w0.5: 1D1.A@11,58.4 11,59.219 12.981,61.2 1C7.2@13,61.2 v2(14.995,61.2) 1U1.1@15.8,60.395 ; 1D2.A@26,58.4 26,59.219 1C8.2@27.981,61.2 ; 1C8.2@28,61.2 v2(29.995,61.2) 1U2.1@30.8,60.395 ; 1D3.A@41,58.4 41,59.219 1C9.2@42.981,61.2 ; 1C9.2@43,61.2 v2(44.995,61.2) 1U3.1@45.8,60.395 ; 2D1.A@56,58.4 56,59.219 2C7.2@57.981,61.2 ; 2C7.2@58,61.2 58.029,61.171 59.966,61.171 v2(59.995,61.2) 2U1.1@60.8,60.395 ; 2D2.A@71,58.4 71,59.219 2C8.2@72.981,61.2 ; 2C8.2@73,61.2 73.029,61.171 74.966,61.171 v2(74.995,61.2) 2U2.1@75.8,60.395 ; 2D3.A@86,58.4 86,59.219 2C9.2@87.981,61.2 ; 2C9.2@88,61.2 v2(89.995,61.2) 2U3.1@90.8,60.395 ; 3D1.A@101,58.4 101,59.219 3C7.2@102.981,61.2 ; 3C7.2@103,61.2 v2(104.995,61.2) 3U1.1@105.8,60.395 ; 3D2.A@116,58.4 116,59.219 3C8.2@117.981,61.2 ; 3C8.2@118,61.2 v2(119.995,61.2) 3U2.1@120.8,60.395 ; 3D3.A@131,58.4 131,59.219 3C9.2@132.981,61.2 ; 3C9.2@133,61.2 v2(134.995,61.2) 3U3.1@135.8,60.395
\CTS: U6.50 U7.11 | length 58
  Bottom Layer w0.254: U7.11@10.415,85.325 12.019,85.325 14.039,87.345 25.365,87.345 29.836,82.875 60.518,82.875 63.643,79.75 U6.50@64.3,79.75 U6.50@64.229,79.821
\RTS: U6.90 U7.8 | length 75.4
  Bottom Layer w0.254: U7.8@10.415,86.675 10.91,86.675 12.548,88.313 15.883,88.313 17.051,89.48 17.051,92.966 23.367,99.283 70.081,99.283 74.75,94.615 U6.90@74.75,92.7
AGND: 1C10.1 1C11.1 1U4.2 1U5.2 2C10.1 2C11.1 2U4.2 2U5.2 3C10.1 3C11.1 3U4.2 3U5.2 C12.1 C13.1 C14.1 C15.1 C16.1 C17.1 C18.1 C19.1 C20.1 C21.1 C63.1 L3.1 R20.1 R21.1 R24.1 R55.1 U6.4 | length 301.4
  Top Layer w0.254: C63.1@85.8,71.5 85.8,71 v2(86,70.8)
  Top Layer w0.5: v2@29,8.748 1C11.1@49,8.748 ; 1C11.1@49,8.8 1C11.1@49,8.748 ; L3.1@82.9,70 L3.1@83.3,70 ; 2C11.1@94,8.7 v2@119,8.7 ; 2C11.1@94,8.748 74,8.748 74,8.7 49,8.7 1C11.1@49,8.748 ; v2@119,8.748 3C11.1@139,8.748
  Top Layer w0.8: R20.1@69.35,66.5 71.25,64.6 C21.1@74.5,64.6 C20.1@76,64.6 77.2,64.6 C19.1@77.5,64.3 C18.1@79,64.3 C17.1@80.5,64.3 C16.1@82,64.3 C15.1@83.5,64.3 C14.1@85,64.3 C12.1@86.5,64.3 C13.1@88,64.3 88.306,64.606 90.856,64.606 v2(92,65.75) 92.35,65.4 141.115,65.4 149.15,57.365 149.15,10.228 147.772,8.85 144.198,8.85 144.148,8.8 3C11.1@139,8.8 ; L3.1@83.3,70 84.62,71.32 85.62,71.32 C63.1@85.8,71.5
  Bottom Layer w0.254: 2U4.2@74.5,13.375 74.5,14.062 75.629,15.192 75.629,17.204 76.4,17.975 R21.1@76.375,18 ; U6.4@82.25,71.3 82.25,69.95 v3(82.6,69.6)
  Bottom Layer w0.5: v2(29,8.8) 29,9.836 29.5,10.336 1U4.2@29.5,13.375 ; v2(44,8.8) 44,9.836 44.5,10.336 1U5.2@44.5,13.375 ; v2(74,8.8) 74,9.836 74.5,10.336 2U4.2@74.5,13.375 ; v2(89,8.8) 89,9.836 89.5,10.336 2U5.2@89.5,13.375 ; v2(119,8.8) 119,9.836 119.5,10.336 3U4.2@119.5,13.375 ; v2(134,8.8) 134,9.836 134.5,10.336 3U5.2@134.5,13.375
  Bottom Layer w0.8: v2(86,70.8) 86.2,70.8 86.248,70.752 86.248,70.406 86.806,69.848 87.152,69.848 R24.1@91.1,65.9 91.85,65.9 v2(92,65.75)
AVCC: 1C10.2 1C11.2 1U4.3 1U5.3 2C10.2 2C11.2 2U4.3 2U5.3 3C10.2 3C11.2 3U4.3 3U5.3 C24.2 C25.2 C44.2 C46.2 C47.2 C48.2 C49.2 C50.2 C62.2 C63.2 L2.1 R19.2 R22.2 R54.2 U6.2 U6.9 U6.34 U6.35 U6.71 U6.107 U6.143 | length 329.7
  Top Layer w0.254: R19.2@81.35,63 81.677,63.327 89.34,63.327 89.94,63.927 91.827,63.927 v2(92.3,64.4)
  Top Layer w0.5: v2(28.5,10.4) v2(43.5,10.4) v2(73.5,10.4) 2C11.2@94,10.4 ; C50.2@82.45,73 82.835,72.615 82.833,72.613 v2(82.748,72.613) ; v2(88.5,10.4) 2C11.2@94,10.4 ; 3C11.2@139,10.4 v2(133.5,10.4) v2(118.5,10.4) 2C11.2@94,10.4
  Top Layer w0.8: 65.8,90 65.8,89.269 66.571,88.498 68.502,88.498 v3(70.5,86.5) ; v2(67.4,72.5) 68.2,73.3 C46.2@68.5,73.3 68.731,73.3 72.5,77.069 v2(72.5,77.5) ; v2(76,78.5) L2.1@76,77.6 77.2,76.4 C62.2@78,76.4 78.108,76.4 79.252,75.256 ; v2(79.5,86.7) 79.5,88.25 v2(82.7,91.45) 82.7,92.25 C48.2@82.75,92.3 ; C24.2@80.3,70 C25.2@80.3,71.5 79.75,72.05 v2(79.75,72.273) 79.248,72.775 79.248,73.694 79.252,73.699 79.252,75.256 ; C50.2@82.2,73 82.2,73.555 80.499,75.256 79.252,75.256 ; 83.25,72.273 84.941,72.273 85.171,72.502 86.752,72.502 ; v2(87.2,70.8) C63.2@87.2,71.5 87.2,72.055 86.752,72.502 ; C49.2@87.3,73.5 87.3,73.05 86.752,72.502 ; v2(92.3,64.4) 138.75,64.4 146.05,57 146.05,54.545 147.6,52.995 147.6,10.6 147.4,10.4 3C11.2@139,10.4
  Bottom Layer w0.254: 63.35,90.25 U6.71@64.3,90.25 v2(65.35,90.25) ; v2(82.7,91.45) 82.7,91.493 83.179,91.972 83.179,92.629 U6.107@83.25,92.7 ; v2(82.748,72.613) 82.748,72.459 83.179,72.028 83.179,71.371 U6.2@83.25,71.3 83.179,71.229 83.179,70.713 83.871,70.022 83.871,69.489 85.749,67.611 86.5,67.611 R22.2@86.5,67.35 ; U6.143@85.7,73.75 86.65,73.75 v3(86.7,73.7)
  Bottom Layer w0.5: v2(28.5,10.4) 28.848,10.748 1U4.3@28.848,13.375 ; v2(43.5,10.4) 43.848,10.748 1U5.3@43.848,13.373 ; 63.35,90.25 63.198,90.402 63.198,90.998 C47.2@63.7,91.5 ; C47.2@63.7,91.5 C47.2@64,91.8 ; 67,70.9 67,72.1 v2(67.4,72.5) ; v2(73.5,10.4) 73.848,10.748 2U4.3@73.848,13.375 ; v2(88.5,10.4) 88.848,10.748 2U5.3@88.848,13.373 ; v2(118.5,10.4) 118.848,10.748 3U4.3@118.848,13.375 ; v2(133.5,10.4) 133.848,10.748 3U5.3@133.848,13.373
  Bottom Layer w0.8: 74,78 74.5,78.5 v2(76,78.5) ; v2(87.2,70.8) 88.287,70.8 89.618,69.469 89.628,69.469 93.118,65.979 93.118,65.218 v2(92.3,64.4)
BOOT_SEL: R49.1 SW2.2 U6.126 | length 35.7
  Top Layer w0.254: v3(95.1,79.5) 95.179,79.579 110.579,79.579 SW2.2@112.75,81.75
  Bottom Layer w0.254: U6.126@85.7,82.25 87.121,82.25 88.15,81.221 92.599,81.221 94.319,79.5 v3(95.1,79.5) ; SW2.2@112.75,75.25 112.75,78.4 R49.1@112.65,78.5 112.75,78.6 SW2.2@112.75,81.75
CLK_50: U6.88 X1.3 | length 5.7
  Top Layer w0.254: v2(73.6,94.3) 73.6,96.6 X1.3@74.85,97.85
  Bottom Layer w0.254: v2(73.6,94.3) 73.75,94.15 U6.88@73.75,92.7
CONF_DONE: R46.1 U6.138 | length 3.1
  Top Layer w0.254: R46.1@87.5,76.85 88,76.35 v3(88,76.3)
  Bottom Layer w0.254: U6.138@85.7,76.25 87.95,76.25 v3(88,76.3)
CRC_ERROR: R39.2 U6.134 | length 34.9
  Top Layer w0.254: v3(95.9,77.5) 101.4,72 114.875,72 R39.2@116.875,70
  Bottom Layer w0.254: U6.134@85.7,78.25 88.356,78.25 88.785,78.679 90.24,78.679 90.84,78.079 92.74,78.079 93.319,77.5 v3(95.9,77.5)
DCBUS: 1C1.1 1C2.1 1C3.1 1Q1.D 1Q2.D 1Q3.D 1Q4.D 1Q5.D 1Q6.D 2C1.1 2C2.1 2C3.1 2Q1.D 2Q2.D 2Q3.D 2Q4.D 2Q5.D 2Q6.D 3C1.1 3C2.1 3C3.1 3Q1.D 3Q2.D 3Q3.D 3Q4.D 3Q5.D 3Q6.D DC+.1 J8.1 R23.2 R51.2 U8.6 U10.3 U10.4 | length 364.5
  Top Layer w0.254: U10.3@6.7,54.05 8,52.75 ; v3(84.5,62.7) 89.6,62.7 v3(90.2,63.3)
  Top Layer w1: v4(8,48) 8,52.75 U10.4@9.3,54.05
  Top Layer w2.54: v1(137,24.5) v1(122,24.5) v1(107,24.5) v1(92,24.5) v1(77,24.5) v1(62,24.5) v1(47,24.5) v1(32,24.5) v1(17,24.5) 6,24.5 DC+.1@4,22.5 12,14.5 v1(17,14.5) v1(32,14.5) v1(47,14.5) v1(62,14.5) v1(77,14.5) v1(92,14.5) v1(107,14.5) v1(122,14.5) v1(137,14.5) 139.525,14.5 v1(140.1,13.925)
  Bottom Layer w0.254: v3(84.5,62.7) 84.5,55.6 88.1,52 88.1,46.417 88.354,46.163 88.354,36.446 94,30.8 2C3.1@94,29 ; v3(90.2,63.3) 91.1,64.2 R23.2@91.1,64.4
  Bottom Layer w0.5: v4@7.85,48 v4(8,48)
  Bottom Layer w1: U8.6@5.635,52.6 5.635,50.215 R51.2@5.85,50
  Bottom Layer w2.54: DC+.1@4,22.5 v2(4,25.3) 4,33.118 9.22,38.338 9.22,42.662 8,43.882 v4(8,48) ; 6.6,49.25 v4@7.85,48 ; 1Q3.D@32,25.075 v1(32,25.75) ; 1Q5.D@47,25.075 v1(47,25.75) ; 2Q1.D@62,25.075 v1(62,25.75) ; 2Q5.D@92,25.075 v1(92,25.75) ; 3Q1.D@107,25.075 v1(107,25.75) ; 3Q3.D@122,25.075 v1(122,25.75) ; 3Q5.D@137,25.075 v1(137,25.75)
  other v1: 17,13.25 32,13.25 47,13.25 62,13.25 77,13.25 92,13.25 107,13.25 122,13.25 137,13.25 17.6,13.925 18.425,13.925 19.275,13.925 20.1,13.925 32.6,13.925 33.425,13.925 34.275,13.925 35.1,13.925 47.6,13.925 48.425,13.925 49.275,13.925 50.1,13.925 62.6,13.925 63.425,13.925 64.275,13.925 65.1,13.925 77.6,13.925 78.425,13.925 79.275,13.925 80.1,13.925 92.6,13.925 93.425,13.925 94.275,13.925 95.1,13.925 107.6,13.925 108.425,13.925 109.275,13.925 110.1,13.925 122.6,13.925 123.425,13.925 124.275,13.925 125.1,13.925 137.6,13.925 138.425,13.925 139.275,13.925 17.625,15.075 18.45,15.075 19.3,15.075 20.125,15.075 32.625,15.075 33.45,15.075 34.3,15.075 35.125,15.075 47.625,15.075 48.45,15.075 49.3,15.075 50.125,15.075 62.625,15.075 63.45,15.075 64.3,15.075 65.125,15.075 77.625,15.075 78.45,15.075 79.3,15.075 80.125,15.075 92.625,15.075 93.45,15.075 94.3,15.075 95.125,15.075 107.625,15.075 108.45,15.075 109.3,15.075 110.125,15.075 122.625,15.075 123.45,15.075 124.3,15.075 125.125,15.075 137.625,15.075 138.45,15.075 139.3,15.075 140.125,15.075 17,15.75 32,15.75 47,15.75 62,15.75 77,15.75 92,15.75 107,15.75 122,15.75 137,15.75 17,23.25 32,23.25 47,23.25 62,23.25 77,23.25 92,23.25 107,23.25 122,23.25 137,23.25 17.6,23.925 18.425,23.925 19.275,23.925 20.1,23.925 32.6,23.925 33.425,23.925 34.275,23.925 35.1,23.925 47.6,23.925 48.425,23.925 49.275,23.925 50.1,23.925 62.6,23.925 63.425,23.925 64.275,23.925 65.1,23.925 77.6,23.925 78.425,23.925 79.275,23.925 80.1,23.925 92.6,23.925 93.425,23.925 94.275,23.925 95.1,23.925 107.6,23.925 108.425,23.925 109.275,23.925 110.1,23.925 122.6,23.925 123.425,23.925 124.275,23.925 125.1,23.925 137.6,23.925 138.425,23.925 139.275,23.925 140.1,23.925 17.625,25.075 18.45,25.075 19.3,25.075 20.125,25.075 32.625,25.075 33.45,25.075 34.3,25.075 35.125,25.075 47.625,25.075 48.45,25.075 49.3,25.075 50.125,25.075 62.625,25.075 63.45,25.075 64.3,25.075 65.125,25.075 77.625,25.075 78.45,25.075 79.3,25.075 80.125,25.075 92.625,25.075 93.45,25.075 94.3,25.075 95.125,25.075 107.625,25.075 108.45,25.075 109.3,25.075 110.125,25.075 122.625,25.075 123.45,25.075 124.3,25.075 125.125,25.075 137.625,25.075 138.45,25.075 139.3,25.075 140.125,25.075 17,25.75 77,25.75
  other v2: 4,19.7 2.02,20.52 5.98,20.52 1.2,22.5 6.8,22.5 2.02,24.48 5.98,24.48
DEV_OE: R50.1 SW1.2 U6.122 | length 27
  Top Layer w0.254: v3(94.6,80.1) 102.1,80.1 SW1.2@103.75,81.75
  Bottom Layer w0.254: U6.122@85.7,84.25 88.312,84.25 90.935,81.627 93.073,81.627 v3(94.6,80.1) ; SW1.2@103.75,75.25 103.75,78.4 R50.1@103.65,78.5 103.75,78.6 SW1.2@103.75,81.75
ENC_A1: 1J1.2 U6.93 | length 26.7
  Bottom Layer w0.254: U6.93@76.25,92.7 76.25,93.527 82.023,99.3 98.14,99.3 1J1.2@99.24,98.2
ENC_A2: 2J1.2 U6.97 | length 38
  Bottom Layer w0.254: U6.97@78.25,92.7 78.25,93.943 81.001,96.694 111.734,96.694 2J1.2@113.24,98.2
ENC_A3: 3J1.2 U6.100 | length 50.4
  Bottom Layer w0.254: U6.100@79.75,92.7 79.75,93.719 81.506,95.474 124.514,95.474 3J1.2@127.24,98.2
ENC_B1: 1J1.3 U6.92 | length 30.1
  Bottom Layer w0.254: U6.92@75.75,92.7 75.75,93.602 81.855,99.706 100.274,99.706 1J1.3@101.78,98.2
ENC_B2: 2J1.3 U6.98 | length 40
  Bottom Layer w0.254: U6.98@78.75,92.7 78.75,93.868 81.169,96.287 113.867,96.287 2J1.3@115.78,98.2
ENC_B3: 3J1.3 U6.101 | length 52.4
  Bottom Layer w0.254: U6.101@80.25,92.7 80.25,93.644 81.674,95.068 126.648,95.068 3J1.3@129.78,98.2
ENC_V: 1J1.1 2J1.1 3J1.1 J16.2 | length 106.1
  Top Layer w0.7: J16.2@32.54,78.54 42.192,88.192 42.192,90.484 42.961,91.252 43.964,91.252 44.732,92.021 44.732,93.024 51.209,99.5 96.5,99.5 ; 1J1.1@96.7,98.2 96.7,99.3 96.5,99.5 ; 2J1.1@110.7,98.2 110.7,99.3 110.5,99.5 ; 3J1.1@124.7,98.2 123.4,99.5 110.5,99.5 ; 96.5,99.5 110.5,99.5
ENC_Z1: 1J1.4 U6.96 | length 29.6
  Bottom Layer w0.254: U6.96@77.75,92.7 77.75,94.018 80.832,97.1 103.22,97.1 1J1.4@104.32,98.2
ENC_Z2: 2J1.4 U6.99 | length 42
  Bottom Layer w0.254: U6.99@79.25,92.7 79.25,93.794 81.337,95.881 116.001,95.881 2J1.4@118.32,98.2
ENC_Z3: 3J1.4 U6.102 | length 54.4
  Bottom Layer w0.254: U6.102@80.75,92.7 80.75,93.569 81.842,94.662 128.782,94.662 3J1.4@132.32,98.2